# Altium PCB LED_Cube.PcbDoc (part 2 of 2)
Units mil, origin at the board's own origin, x right, y up, seen from the top; angles counter-clockwise.
Board outline 3937.01 x 3149.61 mil, 4 copper layers (Top Layer, Layer 1, Layer 2, Bottom Layer), stack 61.811 mil thick; 84 components, 132 nets, 410 pads, 91 vias.
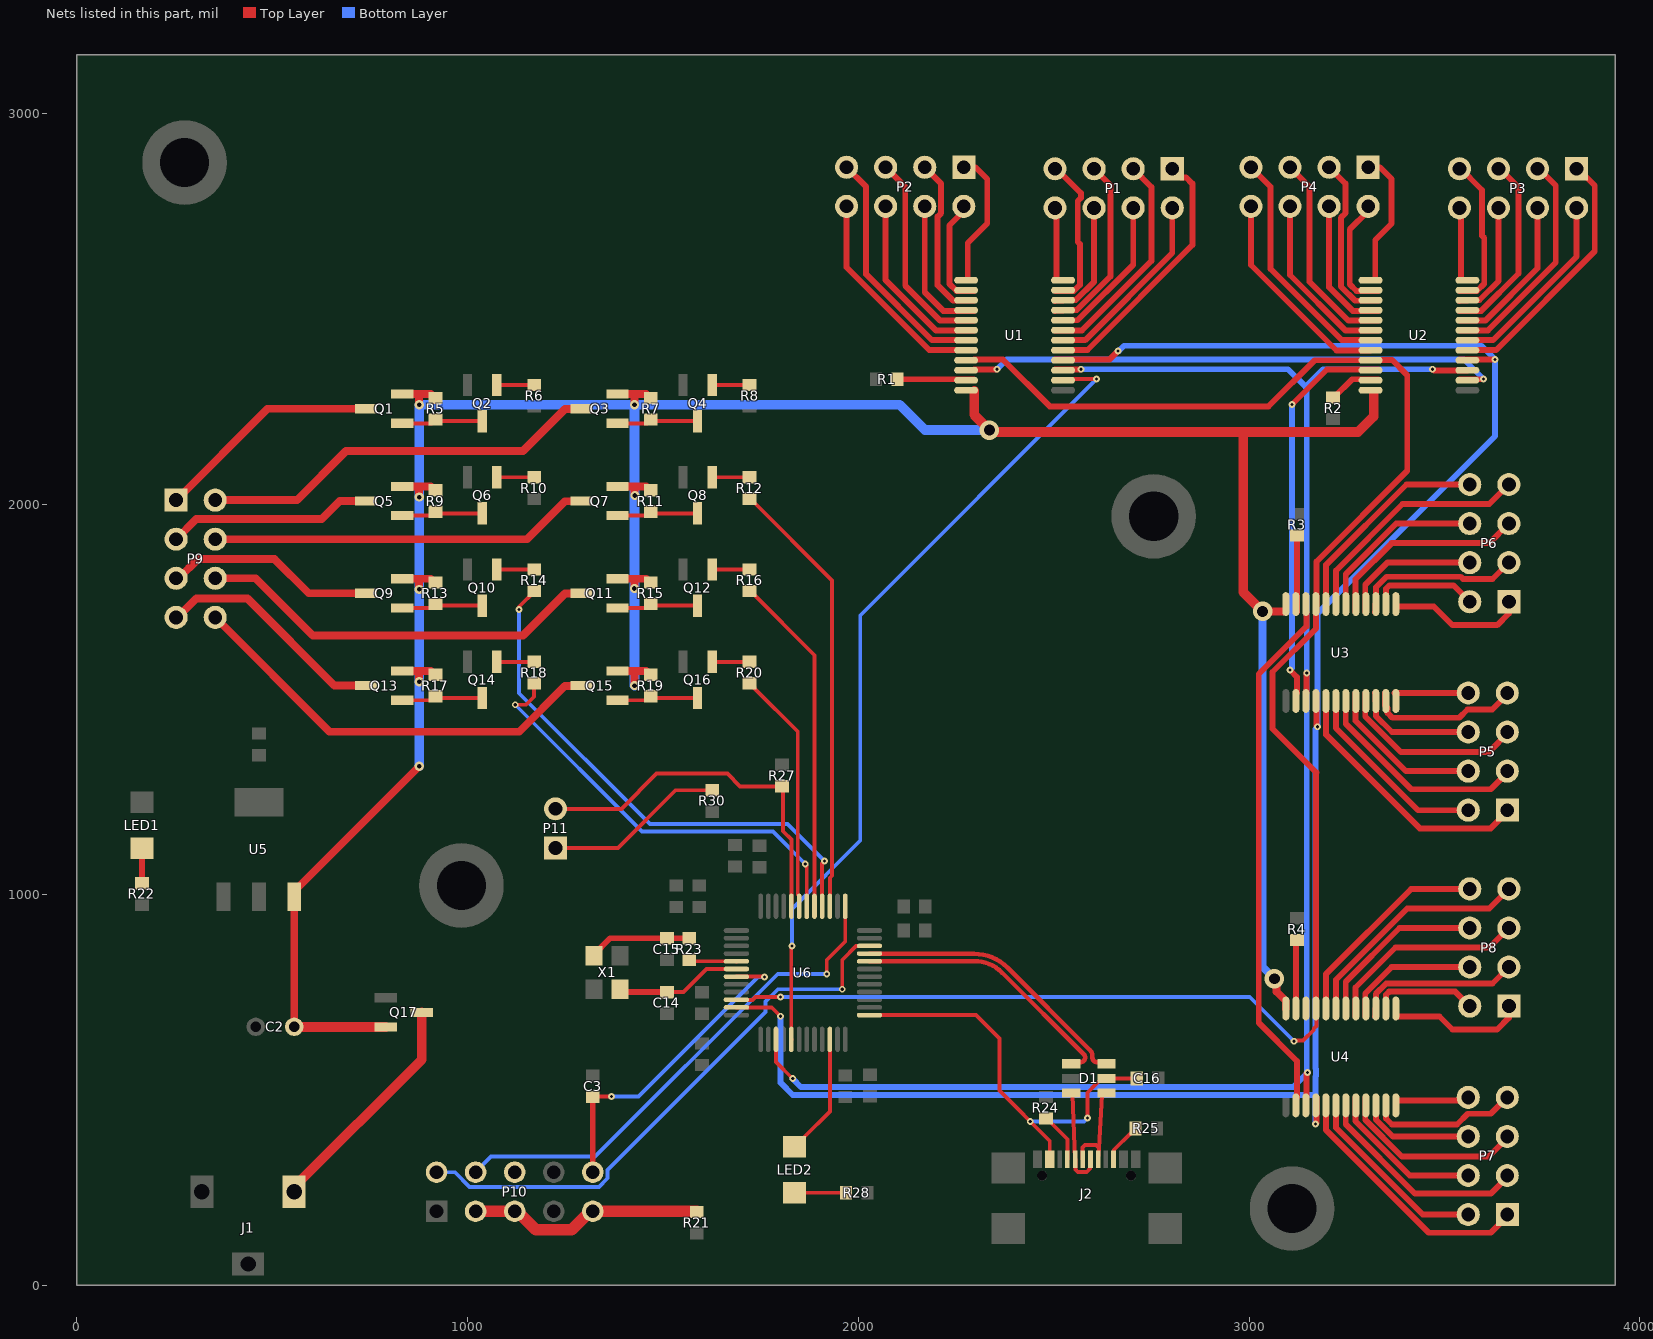
[diagram p4: the nets of this part, all layers, seen from the top]

## Via types
v1: diameter 17.72, hole 7.87, Top Layer to Bottom Layer, 41 vias
v2: diameter 23.62, hole 11.81, Top Layer to Bottom Layer, 35 vias
v3: diameter 50, hole 28, Top Layer to Bottom Layer, 13 vias
v4: diameter 19.68, hole 11.81, Top Layer to Bottom Layer, 1 vias
v5: diameter 47.24, hole 28, Top Layer to Bottom Layer, 1 vias

## Nets (pads, with @x,y where several pads share a name; then routed paths per layer and width w, separated by ;. In a path a pad name is that pad's centre, name@x,y a point inside that pad or via, vN(x,y) a via of type N, cw(c..) or ccw(c..) an arc to the next point about the centre after c; other vN are vias at no path point) (continued)
HS3: R12.2 U6.39 | length 1134
  Top Layer w10: R12.2@1721.65,2013.47 1723.62,2013.47 1932.24,1804.85 1932.24,1048.69 1927.17,1043.62 U6.39@1927.17,997.54 ; U6.39@1927.17,970.47 U6.39@1927.17,997.54 ; U6.39@1927.51,997.88 U6.39@1927.17,997.54
HS4: R14.2 U6.40 | length 1356
  Top Layer w10: v1(1131.89,1729.77) 1131.89,1737.09 1171.26,1776.46 R14.2@1170.47,1777.25 ; U6.40@1907.48,970.47 1907.48,1080.71 v1(1913.39,1086.61)
  Bottom Layer w10: v1(1131.89,1729.77) 1131.89,1515.75 1466.54,1181.1 1818.9,1181.1 v1(1913.39,1086.61)
HS5: R16.2 U6.41 | length 876.8
  Top Layer w10: R16.2@1721.65,1777.25 1723.62,1777.25 1887.8,1613.08 U6.41@1887.8,970.47
HS6: R18.2 U6.42 | length 1112.1
  Top Layer w10: v1(1122.05,1486.22) 1150,1486.22 1170.47,1506.69 R18.2@1170.47,1541.03 ; v1(1864.17,1078.74) 1868.11,1074.8 U6.42@1868.11,970.47
  Bottom Layer w10: v1(1122.05,1486.22) 1446.85,1161.42 1781.5,1161.42 v1(1864.17,1078.74)
HS7: R20.2 U6.43 | length 624.2
  Top Layer w10: R20.2@1721.65,1541.03 1723.62,1541.03 1734.37,1530.28 1734.37,1528.31 1845,1417.68 1845,1000.96 1848.43,997.54 U6.43@1848.43,970.47
HSE_IN: C14.2 U6.6 X1.1 | length 325.6
  Top Layer w10: C14.2@1510,750.79 1552.39,750.79 1611.65,810.04 U6.6@1687.99,810.04
  Top Layer w15: X1.1@1390,758.17 1397.39,750.79 C14.2@1510,750.79
HSE_OUT: R23.2 U6.5 | length 121.4
  Top Layer w10: R23.2@1567.25,831.53 1568.91,829.87 1687.44,829.87 U6.5@1687.78,829.53
Layer0: P9.1 Q1.1 | length 583.1
  Top Layer w20: P9.1@254,2010 487.98,2243.98 Q1.1@740.21,2243.98
Layer1: P9.2 Q3.1 | length 1034.3
  Top Layer w20: P9.2@354,2010 563.15,2010 688.98,2135.83 1141.73,2135.83 1249.25,2243.35 1290.76,2243.35 Q3.1@1291.39,2243.98
Layer2: P9.3 Q5.1 | length 526.7
  Top Layer w20: P9.3@254,1910 305.69,1961.69 626.69,1961.69 672.76,2007.76 Q5.1@740.21,2007.76
Layer3: P9.4 Q7.1 | length 977.9
  Top Layer w20: P9.4@354,1910 1152.13,1910 1249.25,2007.13 1290.76,2007.13 Q7.1@1291.39,2007.76
Layer4: P9.5 Q9.1 | length 543.2
  Top Layer w20: P9.5@254,1810 260.34,1810 309.87,1859.53 505.47,1859.53 593.46,1771.54 Q9.1@740.21,1771.54
Layer5: P9.6 Q11.1 | length 1042.9
  Top Layer w20: P9.6@354,1810 457.36,1810 603.98,1663.39 1141.73,1663.39 1249.25,1770.9 1290.76,1770.9 Q11.1@1291.39,1771.54
Layer6: P9.7 Q13.1 | length 598.6
  Top Layer w20: P9.7@254,1710 257.61,1710 305.91,1758.31 436.57,1758.31 659.56,1535.32 Q13.1@740.21,1535.32
Layer7: P9.8 Q15.1 | length 1107.5
  Top Layer w20: P9.8@354,1710 646.68,1417.32 1131.89,1417.32 1249.25,1534.68 1290.76,1534.68 Q15.1@1291.39,1535.32
LED: LED2.2 U6.22 | length 313
  Top Layer w10: LED2.2@1837.17,355.35 1839.13,355.35 1861.69,377.91 1861.69,379.87 1927.17,445.35 U6.22@1927.17,629.92
LED1_Drv1: P1.1 U1.5 | length 686.9
  Top Layer w15: U1.5@2503.54,2394.51 2586.51,2394.51 2855,2663 2855,2820 2838.93,2836.07 2825.57,2836.07 P1.1@2803.54,2858.1
LED1_Drv2: P3.1 U2.5 | length 685.3
  Top Layer w15: U2.5@3538.54,2394.51 3632.51,2394.51 3885,2647 3885,2815.55 P3.1@3838.54,2862.01
LED1_Drv3: P5.1 U3.5 | length 692.9
  Top Layer w15: U3.5@3197.5,1516.46 3197.5,1409.5 3437,1170 3618.54,1170 P5.1@3665,1216.46
LED1_Drv4: P7.1 U4.5 | length 679.4
  Top Layer w15: U4.5@3197.5,481.46 3197.5,397.5 3460,135 3618.54,135 P7.1@3665,181.46
LED2_Drv1: P1.2 U1.6 | length 507.9
  Top Layer w15: U1.6@2503.54,2419.51 2580.51,2419.51 2803.54,2642.54 P1.2@2803.54,2758.1
LED2_Drv2: P3.2 U2.6 | length 513.2
  Top Layer w15: U2.6@3538.54,2419.51 3624.51,2419.51 3838.54,2633.54 P3.2@3838.54,2758.1
LED2_Drv3: P5.2 U3.6 | length 515.6
  Top Layer w15: U3.6@3222.5,1516.46 3222.5,1426.5 3432.54,1216.46 P5.2@3561.09,1216.46
LED2_Drv4: P7.2 U4.6 | length 508.5
  Top Layer w15: U4.6@3222.5,481.46 3222.5,403.5 3444.54,181.46 P7.2@3561.09,181.46
LED3_Drv1: P1.3 U1.7 | length 575.3
  Top Layer w15: U1.7@2503.54,2444.51 2572.51,2444.51 2750,2622 2750,2811.64 P1.3@2703.54,2858.1
LED3_Drv2: P3.3 U2.7 | length 581.6
  Top Layer w15: U2.7@3538.54,2444.51 3611.51,2444.51 3785,2618 3785,2815.55 P3.3@3738.54,2862.01
LED3_Drv3: P5.3 U3.7 | length 585.1
  Top Layer w15: U3.7@3247.5,1516.46 3247.5,1437.5 3415,1270 3618.54,1270 P5.3@3665,1316.46
LED3_Drv4: P7.3 U4.7 | length 579.2
  Top Layer w15: U4.7@3247.5,481.46 3247.5,412.5 3425,235 3618.54,235 P7.3@3665,281.46
LED4_Drv1: P1.4 U1.8 | length 403.7
  Top Layer w15: U1.8@2504.31,2470.28 2561.28,2470.28 2703.54,2612.54 P1.4@2703.54,2758.1
LED4_Drv2: P3.4 U2.8 | length 410.4
  Top Layer w15: U2.8@3538.54,2469.51 3538.91,2469.87 3583.11,2469.87 3583.48,2469.51 3604.51,2469.51 3738.54,2603.54 P3.4@3738.54,2758.1
LED4_Drv3: P5.4 U3.8 | length 413.3
  Top Layer w15: U3.8@3272.5,1516.46 3272.87,1516.09 3272.87,1471.89 3272.5,1471.52 3272.5,1445.5 3401.54,1316.46 P5.4@3561.09,1316.46
LED4_Drv4: P7.4 U4.8 | length 407.4
  Top Layer w15: U4.8@3272.5,481.46 3272.87,481.09 3272.87,436.89 3272.5,436.52 3272.5,420.5 3411.54,281.46 P7.4@3561.09,281.46
LED5_Drv1: P1.5 U1.9 | length 471
  Top Layer w15: U1.9@2503.54,2494.51 2504.31,2495.28 U1.9@2524.02,2495.28 ; U1.9@2524.02,2495.98 2524.54,2496.5 2559.22,2496.5 2645.57,2582.86 2645.57,2816.07 P1.5@2603.54,2858.1
LED5_Drv2: P3.5 U2.9 | length 484.3
  Top Layer w15: U2.9@3538.54,2494.51 3594.51,2494.51 3690,2590 3690,2810.55 P3.5@3638.54,2862.01
LED5_Drv3: P5.5 U3.9 | length 486.7
  Top Layer w15: U3.9@3297.5,1516.46 3297.5,1456.5 3389,1365 3613.54,1365 P5.5@3665,1416.46
LED5_Drv4: P7.5 U4.9 | length 485.3
  Top Layer w15: U4.9@3297.5,481.46 3297.5,423.78 3391.28,330 3613.54,330 P7.5@3665,381.46
LED6_Drv1: P1.6 U1.10 | length 309
  Top Layer w15: U1.10@2503.54,2519.51 2504.31,2520.28 U1.10@2524.02,2520.28 ; U1.10@2524.02,2521.57 2524.54,2522.09 2556.53,2522.09 2603.54,2569.11 P1.6@2603.54,2758.1
LED6_Drv2: P3.6 U2.10 | length 308.2
  Top Layer w15: U2.10@3538.54,2519.51 3539.31,2520.28 U2.10@3559.02,2520.28 ; U2.10@3559.02,2521.57 3559.54,2522.09 3590.09,2522.09 3638.54,2570.54 P3.6@3638.54,2758.1
LED6_Drv3: P5.6 U3.10 | length 312.7
  Top Layer w15: U3.10@3322.5,1516.46 3323.27,1515.69 U3.10@3323.27,1495.98 ; U3.10@3324.57,1495.98 3324.57,1457.72 3365.83,1416.46 P5.6@3561.09,1416.46
LED6_Drv4: P7.6 U4.10 | length 290.5
  Top Layer w15: U4.10@3324.57,460.98 3325.09,460.46 3325.09,424.48 3368.11,381.46 P7.6@3561.09,381.46
LED7_Drv1: P1.7 U1.11 | length 403.3
  Top Layer w15: P1.7@2503.54,2862.01 2569.57,2795.99 2569.57,2783.56 2561.52,2775.51 2561.52,2670.95 2567.03,2665.44 2567.03,2560.88 2551.42,2545.28 U1.11@2504.31,2545.28
LED7_Drv2: P3.7 U2.11 | length 394.8
  Top Layer w15: P3.7@3538.54,2862.01 3596.52,2804.04 3596.52,2686.73 3602.03,2681.22 3602.03,2563.91 3583.39,2545.28 U2.11@3539.31,2545.28
LED7_Drv3: P5.7 U3.11 | length 395.9
  Top Layer w15: U3.11@3347.5,1516.46 3348.27,1515.69 3348.27,1484.49 3354.39,1478.37 3354.39,1465.48 3366.9,1452.97 3538.17,1452.97 3559.2,1474 3622.54,1474 P5.7@3665,1516.46
LED7_Drv4: P7.7 U4.11 | length 379.5
  Top Layer w15: U4.11@3350.16,460.98 3350.68,460.46 3350.68,427.18 3365.85,412 3532.2,412 3559.63,439.43 3619.06,439.43 P7.7@3661.09,481.46
LED8_Drv1: P1.8 U1.12 | length 203.1
  Top Layer w15: P1.8@2503.54,2758.1 2507,2754.64 2507,2574.01 2508.25,2572.76 U1.12@2524.02,2572.76
LED8_Drv2: P3.8 U2.12 | length 202.5
  Top Layer w15: P3.8@3538.54,2758.1 3543,2753.64 3543,2574.01 3544.25,2572.76 U2.12@3559.02,2572.76
LED8_Drv3: P5.8 U3.12 | length 192.5
  Top Layer w15: U3.12@3372.5,1516.46 P5.8@3561.09,1516.46 P5.8@3565,1516.46
LED8_Drv4: P7.8 U4.12 | length 200.1
  Top Layer w15: U4.12@3375.75,460.98 3375.75,471.77 3377,473.03 3552.66,473.03 P7.8@3561.09,481.46
LED9_Drv1: P2.1 U1.13 | length 355.7
  Top Layer w15: P2.1@2270,2862.01 2300,2862.01 2330,2832.01 2330,2717.91 2280,2667.91 2280,2574.01 2278.75,2572.76 U1.13@2275.98,2572.76
LED9_Drv2: P4.1 U2.13 | length 360.4
  Top Layer w15: P4.1@3305,2862.01 3335,2862.01 3365,2832.01 3365,2717.91 3323,2675.91 3323,2574.01 3321.75,2572.76 U2.13@3310.98,2572.76
LED9_Drv3: P6.1 U3.13 | length 356.8
  Top Layer w15: U3.13@3375.75,1744.02 3375.75,1739.25 3377,1738 3472.91,1738 3520.91,1690 3635,1690 3665,1720 P6.1@3665,1750
LED9_Drv4: P8.1 U4.13 | length 345.3
  Top Layer w15: U4.13@3376,688.54 3487.36,688.54 3520.91,655 3635,655 3665,685 P8.1@3665,715
LED10_Drv1: P2.2 U1.14 | length 283.9
  Top Layer w15: P2.2@2270,2762.01 2270,2750.09 2232.97,2713.06 2232.97,2563.91 2251.61,2545.28 U1.14@2295.69,2545.28
LED10_Drv2: P4.2 U2.14 | length 298.9
  Top Layer w15: P4.2@3305,2762.01 3305,2750.09 3258,2703.09 3258,2562.28 3275.01,2545.28 U2.14@3330.69,2545.28
LED10_Drv3: P6.2 U3.14 | length 274.6
  Top Layer w15: U3.14@3350.16,1744.02 3350.68,1744.54 3350.68,1783.07 3359.46,1791.86 3523.14,1791.86 P6.2@3565,1750
LED10_Drv4: P8.2 U4.14 | length 268.2
  Top Layer w15: U4.14@3350.16,709.02 3350.68,709.54 3350.68,744.11 3358.6,752.03 3527.97,752.03 P8.2@3565,715
LED11_Drv1: P2.3 U1.15 | length 432.3
  Top Layer w15: P2.3@2170,2862.01 2212.03,2819.98 2212.03,2744.6 2203,2735.57 2203,2560 2242.72,2520.28 U1.15@2295.69,2520.28
LED11_Drv2: P4.3 U2.15 | length 438.3
  Top Layer w15: P4.3@3205,2862.01 3247.03,2819.98 3247.03,2744.6 3235,2732.57 3235,2557 3271.72,2520.28 U2.15@3330.69,2520.28
LED11_Drv3: P6.3 U3.15 | length 435
  Top Layer w15: U3.15@3322.5,1723.54 3323.27,1724.31 U3.15@3323.27,1744.02 ; U3.15@3324.57,1744.02 3325.09,1744.54 3325.09,1787.09 3352,1814 3541.56,1814 3547.59,1807.97 3622.97,1807.97 P6.3@3665,1850
LED11_Drv4: P8.3 U4.15 | length 427
  Top Layer w15: U4.15@3322.5,688.54 3323.27,689.31 U4.15@3323.27,709.02 ; U4.15@3324.57,709.02 3324.57,746.28 3351.26,772.97 3622.97,772.97 P8.3@3665,815
LED12_Drv1: P2.4 U1.16 | length 366.1
  Top Layer w15: P2.4@2170,2762.01 2170,2542 2217.49,2494.51 U1.16@2296.46,2494.51
LED12_Drv2: P4.4 U2.16 | length 358.5
  Top Layer w15: P4.4@3205,2762.01 3205,2555 3265.49,2494.51 U2.16@3331.46,2494.51
LED12_Drv3: P6.4 U3.16 | length 360.9
  Top Layer w15: U3.16@3297.5,1723.54 3297.5,1793.5 3354,1850 P6.4@3565,1850
LED12_Drv4: P8.4 U4.16 | length 354.4
  Top Layer w15: U4.16@3297.5,688.54 3297.5,747.5 3365,815 P8.4@3565,815
LED13_Drv1: P2.5 U1.17 | length 537.2
  Top Layer w15: P2.5@2070,2862.01 2120,2812.01 2120,2559 2209.49,2469.51 U1.17@2296.46,2469.51
LED13_Drv2: P4.5 U2.17 | length 531.7
  Top Layer w15: P4.5@3105,2862.01 3155,2812.01 3155,2569 3254.49,2469.51 3286.52,2469.51 3286.89,2469.87 3331.09,2469.87 U2.17@3331.46,2469.51
LED13_Drv3: P6.5 U3.17 | length 535.5
  Top Layer w15: U3.17@3272.5,1723.54 3272.5,1807.5 3365,1900 3615,1900 P6.5@3665,1950
LED13_Drv4: P8.5 U4.17 | length 529.6
  Top Layer w15: U4.17@3272.5,688.54 3272.5,762.5 3375,865 3615,865 P8.5@3665,915
LED14_Drv1: P2.6 U1.18 | length 468.7
  Top Layer w15: P2.6@2070,2762.01 2070,2573 2198.49,2444.51 U1.18@2296.46,2444.51
LED14_Drv2: P4.6 U2.18 | length 461.1
  Top Layer w15: P4.6@3105,2762.01 3105,2586 3246.49,2444.51 U2.18@3331.46,2444.51
LED14_Drv3: P6.6 U3.18 | length 468.1
  Top Layer w15: U3.18@3247.5,1723.54 3247.5,1820.5 3377,1950 P6.6@3565,1950
LED14_Drv4: P8.6 U4.18 | length 463.4
  Top Layer w15: U4.18@3247.5,688.54 3247.5,777.5 3385,915 P8.6@3565,915
LED15_Drv1: P2.7 U1.19 | length 641
  Top Layer w15: P2.7@1970,2862.01 2020,2812.01 2020,2588 2188.49,2419.51 U1.19@2296.46,2419.51
LED15_Drv2: P4.7 U2.19 | length 612.4
  Top Layer w15: P4.7@3005,2862.01 3055,2812.01 3055,2602.01 3237.28,2419.73 3310.46,2419.73 U2.19@3310.98,2419.21
LED15_Drv3: P6.7 U3.19 | length 639.8
  Top Layer w15: U3.19@3222.5,1723.54 3222.5,1829.5 3393,2000 3615,2000 P6.7@3665,2050
LED15_Drv4: P8.7 U4.19 | length 632.8
  Top Layer w15: U4.19@3222.5,688.54 3222.5,782.5 3405,965 3615,965 P8.7@3665,1015
LED16_Drv1: P2.8 U1.20 | length 570.1
  Top Layer w15: P2.8@1970,2762.01 1970,2606 2181.49,2394.51 U1.20@2296.46,2394.51
LED16_Drv2: P4.8 U2.20 | length 547
  Top Layer w15: P4.8@3005,2762.01 3005,2612.01 3224.01,2393 3286.79,2393 3286.89,2393.1 3310.46,2393.1 U2.20@3310.98,2393.62
LED16_Drv3: P6.8 U3.20 | length 573.6
  Top Layer w15: U3.20@3197.5,1723.54 3197.5,1844.5 3403,2050 P6.8@3565,2050
LED16_Drv4: P8.8 U4.20 | length 566.5
  Top Layer w15: U4.20@3197.5,688.54 3197.5,797.5 3415,1015 P8.8@3565,1015
NetC15_2: C15.2 R23.1 X1.3 | length 264.2
  Top Layer w15: X1.3@1323.86,844 1323.86,847.94 1364.5,888.58 C15.2@1510,888.58 R23.1@1567.24,888.6
NetJ1_1: J1.1 Q17.1 | length 594.2
  Top Layer w25: J1.1@556.22,239.95 556.22,251.76 882.87,578.41 Q17.1@882.87,698.82
NetJ2_A5: J2.A5 R24.2 | length 127.3
  Top Layer w10: R24.2@2480,425.47 2483.94,425.47 2535.19,374.22 J2.A5@2535.19,323.35
NetJ2_B5: J2.B5 R25.2 | length 102.5
  Top Layer w10: J2.B5@2653.3,323.35 2654.2,324.25 2654.2,347.25 2696.23,389.28 2698.69,389.28 2707.47,398.06 R25.2@2707.47,402
NetLED1_1: LED1.1 R22.2 | length 87.4
  Top Layer w15: R22.2@166.34,1031.76 LED1.1@166.34,1119.12
NetLED2_1: LED2.1 R28.2 | length 129.4
  Top Layer w10: LED2.1@1837.17,237.24 R28.2@1966.54,237.24
NetP10_3: P10.3 P10.5 P10.9 R21.2 | length 605.4
  Top Layer w30: P10.3@1020.49,189.87 P10.5@1120.49,189.87 1127.29,189.87 1174.84,142.31 1266.13,142.31 1313.69,189.87 P10.9@1320.49,189.87 R21.2@1586.49,189.87
NetP11_1: P11.1 R30.1 | length 487.2
  Top Layer w10: P11.1@1200,1120 1385,1120 1532.56,1267.56 R30.1@1626.06,1267.56
NetP11_2: P11.2 R27.2 U6.44 | length 972.6
  Top Layer w10: P11.2@1200,1220 P11.2@1225,1220 1393.94,1220 1483.94,1310 1665,1310 1697.56,1277.44 R27.2@1805,1277.44 1807.56,1274.88 1807.56,1162.44 1828.74,1141.26 U6.44@1828.74,970.47
NetQ1_2: Q1.3 Q2.3 R5.1 | length 210.5
  Top Layer w10: Q1.3@832.73,2206.58 907.63,2206.58 R5.1@917.47,2216.43 921.61,2212.29 Q2.3@1037.47,2212.29
NetQ2_2: Q2.1 R6.1 | length 95.6
  Top Layer w10: Q2.1@1074.87,2304.81 R6.1@1170.47,2304.81
NetQ3_2: Q3.3 Q4.3 R7.1 | length 210.5
  Top Layer w10: Q3.3@1383.91,2206.58 1458.81,2206.58 R7.1@1468.65,2216.43 1472.79,2212.29 Q4.3@1588.65,2212.29
NetQ4_2: Q4.1 R8.1 | length 95.6
  Top Layer w10: Q4.1@1626.06,2304.81 R8.1@1721.65,2304.81
NetQ5_2: Q5.3 Q6.3 R9.1 | length 210.5
  Top Layer w10: Q5.3@832.73,1970.36 907.63,1970.36 R9.1@917.47,1980.2 921.61,1976.07 Q6.3@1037.47,1976.07
NetQ6_2: Q6.1 R10.1 | length 95.6
  Top Layer w10: Q6.1@1074.87,2068.59 R10.1@1170.47,2068.59
NetQ7_2: Q7.3 Q8.3 R11.1 | length 210.5
  Top Layer w10: Q7.3@1383.91,1970.36 1458.81,1970.36 R11.1@1468.65,1980.2 1472.79,1976.07 Q8.3@1588.65,1976.07
NetQ8_2: Q8.1 R12.1 | length 95.6
  Top Layer w10: Q8.1@1626.06,2068.59 R12.1@1721.65,2068.59
NetQ9_2: Q9.3 Q10.3 R13.1 | length 210.5
  Top Layer w10: Q9.3@832.73,1734.14 907.63,1734.14 R13.1@917.47,1743.98 921.61,1739.85 Q10.3@1037.47,1739.85
NetQ10_2: Q10.1 R14.1 | length 95.6
  Top Layer w10: Q10.1@1074.87,1832.37 R14.1@1170.47,1832.37
NetQ11_2: Q11.3 Q12.3 R15.1 | length 210.5
  Top Layer w10: Q11.3@1383.91,1734.14 1458.81,1734.14 R15.1@1468.65,1743.98 1472.79,1739.85 Q12.3@1588.65,1739.85
NetQ12_2: Q12.1 R16.1 | length 95.6
  Top Layer w10: Q12.1@1626.06,1832.37 R16.1@1721.65,1832.37
NetQ13_2: Q13.3 Q14.3 R17.1 | length 210.5
  Top Layer w10: Q13.3@832.73,1497.92 907.63,1497.92 R17.1@917.47,1507.76 921.61,1503.63 Q14.3@1037.47,1503.63
NetQ14_2: Q14.1 R18.1 | length 95.6
  Top Layer w10: Q14.1@1074.87,1596.15 R18.1@1170.47,1596.15
NetQ15_2: Q15.3 Q16.3 R19.1 | length 210.5
  Top Layer w10: Q15.3@1383.91,1497.92 1458.81,1497.92 R19.1@1468.65,1507.76 1472.79,1503.63 Q16.3@1588.65,1503.63
NetQ16_2: Q16.1 R20.1 | length 95.6
  Top Layer w10: Q16.1@1626.06,1596.15 R20.1@1721.65,1596.15
NetR1_2: R1.2 U1.23 | length 193.9
  Top Layer w15: R1.2@2102.53,2319.51 2211,2319.51 U1.23@2296.46,2319.51
NetR2_2: R2.2 U2.23 | length 135.1
  Top Layer w15: R2.2@3215,2274.53 3218.94,2274.53 3263.92,2319.51 U2.23@3331.46,2319.51
NetR3_2: R3.2 U3.23 | length 193.9
  Top Layer w15: U3.23@3122.5,1723.54 3122.5,1809 R3.2@3122.5,1917.47
NetR4_2: R4.2 U4.23 | length 174.6
  Top Layer w15: U4.23@3119.84,709.02 3120.36,709.54 3120.36,880.33 R4.2@3122.5,882.47
NetU1_2: U1.2 U6.17 | length 2121
  Top Layer w10: U6.17@1828.74,629.92 1828.39,630.27 1828.39,658.12 1828.35,658.16 1828.35,867.34 v1(1830.21,869.2) ; U1.2@2503.54,2319.51 2503.79,2319.75 2609.75,2319.75 v1(2610,2320)
  Bottom Layer w10: v1@1830,869 1830,963.86 2005,1138.86 2005,1715 v1(2610,2320)
NetU1_3: U1.3 U2.3 U3.3 U4.3 U6.15 | length 4428.3
  Top Layer w10: U6.15@1789.37,629.92 1789.72,629.57 1789.72,571.69 v1(1832.21,529.2)
  Top Layer w15: U1.3@2503.54,2344.51 2503.79,2344.75 2569.75,2344.75 v1(2570,2345) ; U4.3@3147.5,481.46 3147.5,541.76 3150,544.26 v1(3150,545) ; U3.3@3147.5,1516.46 3147.5,1567.5 v1(3147.81,1567.81) ; v1(3470,2345) 3470.74,2345 3473.74,2342 3558.57,2342 U2.3@3559.02,2342.44
  Bottom Layer w15: v1@1832,529 1853.36,507.64 3112.64,507.64 v1(3150,545) 3147.81,547.19 v1(3147.81,1567.81) 3147.81,2297.19 3145,2300 ; v1(2570,2345) 3100,2345 3145,2300 ; v1(3470,2345) 3190,2345 3145,2300
NetU1_4: U1.4 U2.4 U3.4 U4.4 U6.11 | length 5227.4
  Top Layer w10: U6.11@1687.99,711.61 1778.54,711.61 v1(1801.18,688.98)
  Top Layer w15: U1.4@2503.54,2369.51 2642.5,2369.51 2664.35,2391.36 v1(2665,2391.36) ; v1(3170,413) 3170,413.74 3172.5,416.24 U4.4@3172.5,481.46 ; U3.4@3172.5,1516.46 3172.5,1433.24 3175,1430.74 v1(3175,1430) ; U2.4@3538.54,2369.51 3538.79,2369.75 3629.75,2369.75 v1(3630,2370)
  Bottom Layer w15: v1(1801.18,688.98) 1801.18,518.82 1832.36,487.64 3170,487.64 ; v1(2665,2391.36) 2665.52,2391.88 2666.88,2391.88 2680,2405 3595,2405 v1(3630,2370) 3630,2174.44 3175,1719.44 v1(3175,1430) 3175,1429.26 3170,1424.26 3170,555.21 3171.36,553.85 3171.36,536.15 3170,534.79 3170,487.64 ; v1(3170,413) 3170,487.64
NetU1_21: U1.21 U2.21 U3.21 U4.21 U6.10 | length 4611.4
  Top Layer w10: U6.10@1687.99,731.3 1688.34,730.95 1729.64,730.95 1736.88,738.19 v1(1801.18,738.19) ; v1(3115,625) 3116.48,626.48 3138.1,626.48 3165.77,654.15 3165.77,657.4 3172.5,664.13 U4.21@3172.5,688.54
  Top Layer w15: U1.21@2296.46,2369.51 2370.49,2369.51 2490,2250 3050,2250 3168,2368 U2.21@3310.98,2368.03 ; U4.21@3171.02,709.02 3171.02,1311.02 3172.5,1312.5 3060,1425 3060,1570 3171.73,1681.73 3171.73,1722.78 3172.5,1723.54 3172.5,1852.5 3405,2085 3405,2330 3366.26,2368.74 3335.27,2368.74 3335.08,2368.55 3311.5,2368.55 U2.21@3310.98,2368.03
  Bottom Layer w10: v1(1801.18,738.19) 3001.81,738.19 v1(3115,625)
NetU1_22: U1.22 U2.2 | length 1396.5
  Top Layer w15: U1.22@2296.46,2344.51 2354.51,2344.51 v1(2355,2345) ; U2.2@3538.54,2319.51 3599.51,2319.51 v1(3600,2320)
  Bottom Layer w15: v1(2355,2345) 2380,2370 2440,2370 3550,2370 v1(3600,2320)
NetU2_22: U2.22 U3.2 | length 1006.4
  Top Layer w15: v1(3105,1575) 3122.5,1557.5 U3.2@3122.5,1516.46 ; v1(3110,2255) 3199.51,2344.51 U2.22@3331.46,2344.51
  Bottom Layer w15: v1(3105,1575) 3110,1580 v1(3110,2255)
NetU3_22: U3.22 U4.2 | length 1333.2
  Top Layer w15: U4.2@3122.5,481.46 3122.5,574.57 3025,672.07 3025,1565 3146.73,1686.73 3146.73,1722.78 U3.22@3147.5,1723.54
NetU4_22: U4.22
RST: C3.2 P10.10 U6.7 | length 830.7
  Top Layer w10: C3.2@1320.49,482.31 1321.44,483.27 v1(1368.06,483.27) ; U6.7@1687.99,790.35 1758.86,790.35 v1(1759.6,789.62)
  Top Layer w15: P10.10@1320.49,289.87 C3.2@1320.49,482.31
  Bottom Layer w10: v1(1368.06,483.27) 1437.27,483.27 1743.62,789.62 v1(1759.6,789.62)
SWCLK: P10.4 U6.37 | length 1301.8
  Top Layer w10: v1(1919.29,797.24) 1919.29,832.8 1966.54,880.05 U6.37@1966.54,970.47
  Bottom Layer w10: P10.4@1020.49,289.87 1060.34,329.72 1326.37,329.72 1793.89,797.24 v1(1919.29,797.24)
SWDIO: P10.2 U6.34 | length 1450.9
  Top Layer w10: v1(1958.87,758.07) 1958.87,833.23 1994.39,868.75 2028.2,868.75 U6.34@2028.54,869.09
  Bottom Layer w10: P10.2@920.49,289.87 967.37,289.87 1004.93,252.31 1336.05,252.31 1358.05,274.32 1358.05,295.31 1630.94,568.2 1762.63,699.89 1762.63,726.31 1794.39,758.07 v1(1958.87,758.07)
SWO: P10.6
USBD_N: D1.1 U6.32 | length 696.4
  Top Layer w11.57: U6.32@2028.54,829.72 2055.18,829.72 cw(c2056.53,828.38) 2056.53,830.28 2297.01,830.28 cw(c2297.01,730.28) 2367.72,800.99 2577.33,591.38 cw(c2569.15,583.2) 2580.72,583.2 cw(c2569.15,583.2) 2577.33,575.02 cw(c2569.15,583.2) 2569.15,571.63 2554.94,571.63 ccw(c2554.94,557.18) D1.1@2544.72,567.4
USBD_P: D1.6 U6.33 | length 726
  Top Layer w11.57: U6.33@2028.54,849.41 2055.18,849.41 ccw(c2056.53,850.76) 2056.53,848.85 2297.06,848.85 cw(c2297.06,730.42) 2380.81,814.16 2593.18,601.79 cw(c2578.43,587.05) 2599.28,587.05 2599.28,583.2 ccw(c2610.85,583.2) 2602.67,575.02 ccw(c2610.85,583.2) 2610.85,571.63 2625.06,571.63 cw(c2625.06,557.18) D1.6@2635.28,567.4
USBDI_N: D1.3 J2.A7 J2.B7 | length 259.5
  Top Layer w10: D1.3@2548.6,487.72 J2.B7@2554.87,323.35 2555.78,322.44 2555.78,296.57 2561.64,290.71 2584.6,290.71 2593.34,299.44 2593.34,322.44 J2.A7@2594.24,323.35
USBDI_P: D1.4 J2.A6 J2.B6 | length 241.6
  Top Layer w10: J2.A6@2574.56,323.35 2574,323.9 2574,353.14 2579.86,359 2608.42,359 2615.57,351.85 ; J2.B6@2613.93,323.35 2615.57,351.85 ; D1.4@2623.4,487.72 2615.57,351.85
V_USB: C16.2 D1.5 J2.A4-B9 U6.25 | length 1071.7
  Top Layer w10: U6.25@2028.54,691.93 2028.74,691.73 2301.74,691.73 2361,632.47 2361,498.83 2487.42,372.42 ; J2.A4-B9@2489.91,323.35 2489.91,369.92 ; v1@2586,428.96 2586.29,429.25 2586.29,493.19 2608.72,515.62 2609.09,515.62 2623.46,530 D1.5@2635.28,530 C16.2@2712.44,530
  Bottom Layer w10: v1(2440,420) 2577.62,420 v1(2586.29,428.67)
VCC: C2.1 Q1.2 Q3.2 Q5.2 Q7.2 Q9.2 Q11.2 Q13.2 Q15.2 Q17.2 R5.2 R7.2 R9.2 R11.2 R13.2 R15.2 R17.2 R19.2 U1.24 U2.24 U3.24 U4.24 U5.3 | length 7853
  Top Layer w20: C2.1@556.22,662 U5.3@556.22,995.1 556.22,1008.98 v2(875.98,1328.74) ; Q13.2@832.73,1572.72 875.98,1572.72 ; Q9.2@832.73,1808.94 875.98,1808.94 ; Q5.2@832.73,2045.17 875.98,2045.17 ; Q1.2@832.73,2281.39 875.98,2281.39 ; v2(875.98,1545.28) 875.98,1572.72 ; v2(875.98,1781.5) 875.98,1808.94 ; v2(875.98,2017.72) 875.98,2045.17 ; v2(875.98,2253.94) 875.98,2281.39 ; R17.2@917.47,1562.88 915.5,1562.88 905.66,1572.72 875.98,1572.72 ; R13.2@917.47,1799.1 915.5,1799.1 905.66,1808.94 875.98,1808.94 ; R9.2@917.47,2035.32 915.5,2035.32 905.66,2045.17 875.98,2045.17 ; R5.2@917.47,2271.54 915.5,2271.54 905.66,2281.39 875.98,2281.39 ; Q15.2@1383.91,1572.72 1427.17,1572.72 ; Q11.2@1383.91,1808.94 1427.17,1808.94 ; Q7.2@1383.91,2045.17 1427.17,2045.17 ; Q3.2@1383.91,2281.39 1427.17,2281.39 ; v2(1426.9,1783.99) 1427.17,1784.26 1427.17,1808.94 ; v2(1427.17,1535.43) 1427.17,1572.72 ; v2(1427.17,2253.94) 1427.17,2281.39 ; v2(1428.15,2021.86) 1427.17,2022.85 1427.17,2045.17 ; R19.2@1468.65,1562.88 1466.68,1562.88 1456.84,1572.72 1427.17,1572.72 ; R15.2@1468.65,1799.1 1466.68,1799.1 1456.84,1808.94 1427.17,1808.94 ; R11.2@1468.65,2035.32 1466.68,2035.32 1456.84,2045.17 1427.17,2045.17 ; R7.2@1468.65,2271.54 1466.68,2271.54 1456.84,2281.39 1427.17,2281.39 ; v3(3034.83,1725.19) 3035.01,1725 U3.24@3087,1725 ; v3(3065,785) 3070.74,779.26 3070.74,751.9 3094.25,728.39 U4.24@3094.25,709.02
  Top Layer w25: C2.1@556.22,662 556.51,661.71 790.06,661.71 Q17.2@790.35,661.42 ; U1.24@2296.46,2290.28 2296.46,2228.54 v3@2335.67,2189.33 ; v3(2335.65,2189.32) 2340.43,2184.53 2358.11,2184.53 2358.45,2184.19 2985,2184.19 ; v3(3034.83,1725.19) 2985,1775 2985,2184.19 ; U2.24@3319,2287.62 3319,2224 3279.19,2184.19 2985,2184.19
  Bottom Layer w20: v3(3034.83,1725.19) 3034.83,815.17 v3(3065,785)
  Bottom Layer w25: v2(875.98,1328.74) v2(875.98,1545.28) v2(875.98,1781.5) v2(875.98,2017.72) v2(875.98,2253.94) v2(1427.17,2253.94) ; v2(1427.17,1535.43) 1427.17,1783.99 1427.17,2021.86 v2(1427.17,2253.94) ; v3(2335.65,2189.32) 2170.92,2189.32 2106.3,2253.94 v2(1427.17,2253.94)
pads on no net: J2. J2.1 J2.2 J2.3 J2.4 J2.A8 J2.B4-A9 J2.B8 P10.7 P10.8 U6.2 U6.3 U6.4 U6.12 U6.13 U6.14 U6.16 U6.21 U6.26 U6.27 U6.28 U6.29 U6.30 U6.31 U6.38 U6.45 U6.46

## Polygon pours and split planes (outlines as drawn)
GND on Layer 1 "CenterGNDPlane" (solid, remove dead copper, pour order 0): 0,0 0,3937.01 3937.01,3937.01 3937.01,0
3.3V on Layer 2 "PWR_Plane" (solid, remove dead copper, pour order 1): 0,0 0,3937.01 3937.01,3937.01 3937.01,0
GND on Bottom Layer "GNDBot" (solid, remove dead copper, pour order 3): 0,0 0,3937.01 3937.01,3937.01 3937.01,0
GND on Top Layer "GNDTop" (solid, remove dead copper, pour order 2): 0,0 0,3937.01 3937.01,3937.01 3937.01,0

## Keep-outs
Keep-Out Layer:
  the board outline again, w10

## Silkscreen, mask and mechanical layers (free items; w line width, h text height)
Top Overlay:
  text "LED Cube Controller V1.0" at 195,2690 h60
Mechanical 1:
  the board outline again, w10

## Text inside footprints (layer, text, board x,y; h text height)
P1: Top Overlay "8" at 2443.54,2778.1 h50 r180; Top Overlay "7" at 2443.54,2878.1 h50 r180; Top Overlay "1" at 2883.54,2878.1 h50 r180; Top Overlay "2" at 2883.54,2778.1 h50 r180
P2: Top Overlay "8" at 1910,2782.01 h50 r180; Top Overlay "7" at 1910,2882.01 h50 r180; Top Overlay "1" at 2350,2882.01 h50 r180; Top Overlay "2" at 2350,2782.01 h50 r180
P3: Top Overlay "8" at 3478.54,2778.1 h50 r180; Top Overlay "7" at 3478.54,2878.1 h50 r180; Top Overlay "1" at 3918.54,2878.1 h50 r180; Top Overlay "2" at 3918.54,2778.1 h50 r180
P4: Top Overlay "8" at 2945,2782.01 h50 r180; Top Overlay "7" at 2945,2882.01 h50 r180; Top Overlay "1" at 3385,2882.01 h50 r180; Top Overlay "2" at 3385,2782.01 h50 r180
P5: Top Overlay "8" at 3581.09,1576.46 h50 r90; Top Overlay "7" at 3681.09,1576.46 h50 r90; Top Overlay "1" at 3681.09,1136.46 h50 r90; Top Overlay "2" at 3581.09,1136.46 h50 r90
P6: Top Overlay "8" at 3585,2110 h50 r90; Top Overlay "7" at 3685,2110 h50 r90; Top Overlay "1" at 3685,1670 h50 r90; Top Overlay "2" at 3585,1670 h50 r90
P7: Top Overlay "8" at 3581.09,541.46 h50 r90; Top Overlay "7" at 3681.09,541.46 h50 r90; Top Overlay "1" at 3681.09,101.46 h50 r90; Top Overlay "2" at 3581.09,101.46 h50 r90
P8: Top Overlay "8" at 3585,1075 h50 r90; Top Overlay "7" at 3685,1075 h50 r90; Top Overlay "1" at 3685,635 h50 r90; Top Overlay "2" at 3585,635 h50 r90
P9: Top Overlay "2" at 334,2090 h50 r270; Top Overlay "1" at 234,2090 h50 r270; Top Overlay "7" at 234,1650 h50 r270; Top Overlay "8" at 334,1650 h50 r270